# Altium PCB PCB1.PcbDoc
Units mm, origin at the board's own origin, x right, y up, seen from the top; angles counter-clockwise.
Board outline 37 x 13.8 mm, 2 copper layers (Top Layer, Bottom Layer), stack 0.98 mm thick; 3 components, 4 nets, 16 pads, 2 vias.
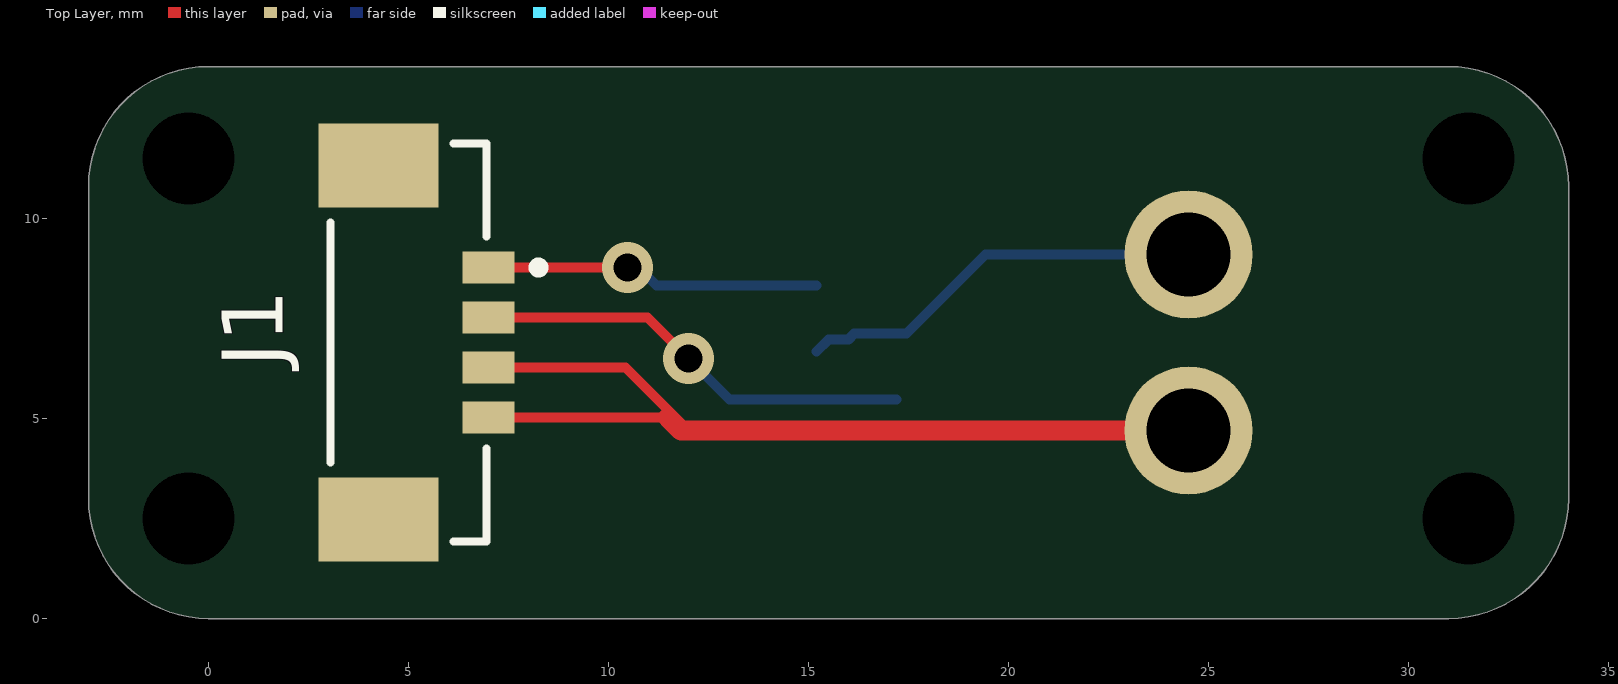
[diagram p0: Top Layer view]
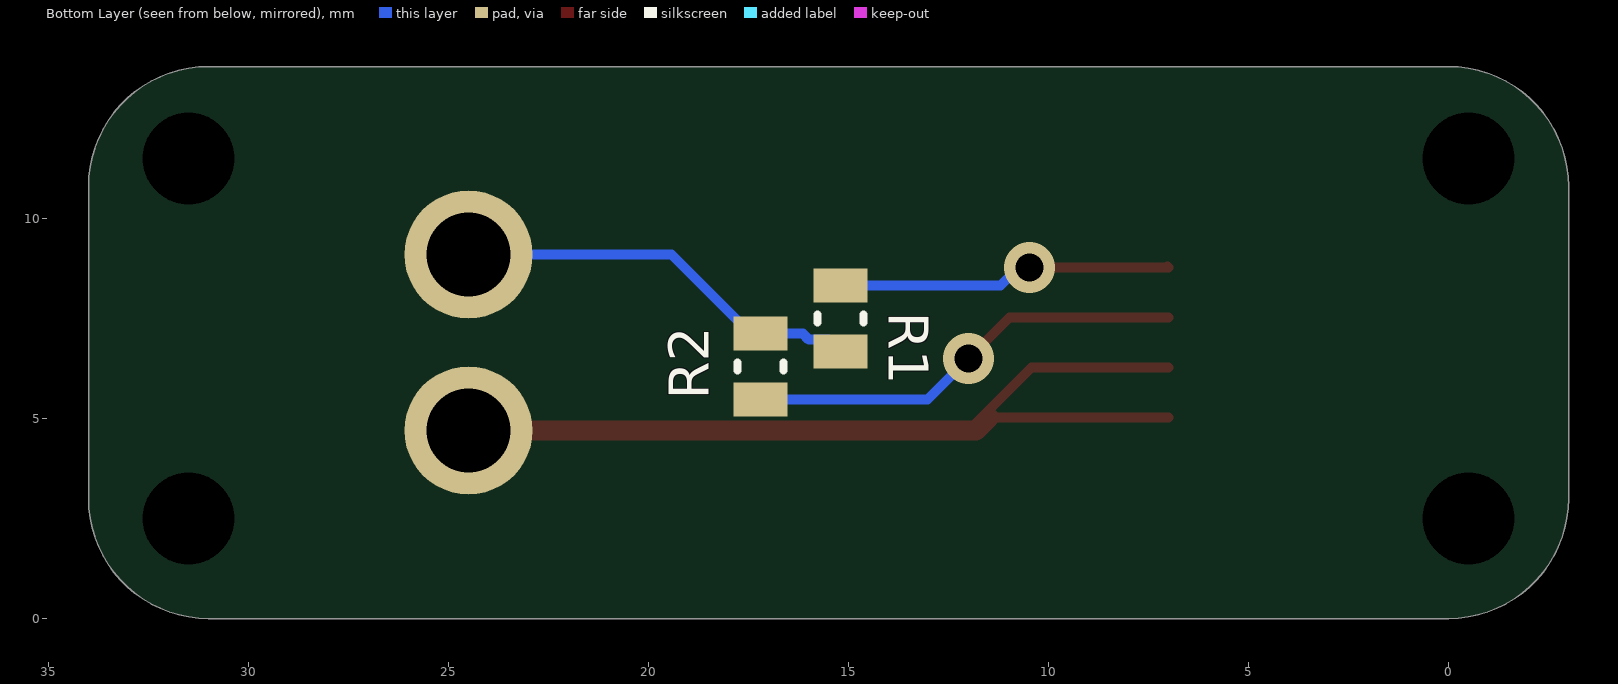
[diagram p1: Bottom Layer view, seen from below]

## Layer stack, top to bottom
Top Solder: solder mask 0.0102, Solder Resist, Dk 3.5
Top Layer: signal copper 0.0356
Dielectric 1: dielectric 0.9086, FR-4, Dk 4.8
Bottom Layer: signal copper 0.0356
Bottom Solder: solder mask 0.0102, Solder Resist, Dk 3.5

## Board outline
-3,3 ccw(c0,3) 0,0 31,0 ccw(c31,3) 34,3 34,10.8 ccw(c31,10.8) 31,13.8 0,13.8 ccw(c0,10.8) -3,10.8

## Design rules (kind name [scope] priority, off if disabled: settings)
Clearance [All] p1: gap=0.254 ignorepadtopadclearanceinfootprint=FALSE except(0: Arc-Hole Track-Hole SMDPad-Hole THPad-Hole Via-Hole Fill-Hole Poly-Hole Region-Hole Text-Hole)
PolygonConnect [All] p1: connectstyle=Relief reliefconductorwidth=0.254 reliefentries=4 polygonreliefangle="90 Angle" airgapwidth=0.254
RoutingVias [All] p1: holewidth=0.711 width=1.27 viastyle="Through Hole" minholewidth=0.711 minwidth=1.27 maxholewidth=0.711 maxwidth=1.27
SolderMaskExpansion [All] p1: expansion=0.102 istentingtop=FALSE
Width [All] p1: maxlimit=0.254 minlimit=0.254 preferedwidth=0.254
30 further rules are at their usual default settings.

## Components (designator, comment, footprint, x,y, rotation, side; value= is the part's Value field where it differs from the comment)
J1 "533980471" FP-533980471-MFG 5,6.9 r90 top
R1 "CRCW0805100RFKEA" RESC2013X50X30LL20T20 15.2,7.5 r270 bottom
R2 "CRCW0805100RFKEA" RESC2013X50X30LL20T20 17.2,6.3 r90 bottom

## Footprints (in the part's own frame and the unit in brackets; to place one, negate y for a bottom-side part, rotate by r counter-clockwise, add the part's x,y. Pads: shape width x height; smd on the part's side, far side on the other; paste and mask are expansions set on the pad)
FP-533980471-MFG [mm]
  rect 0.8x1.3 smd paste+0 mask+0: 1(1.875,-2) 2(0.625,-2) 3(-0.625,-2) 4(-1.875,-2)
  rect 2.1x3 smd paste+0 mask+0: 5(-4.425,0.75) 6(4.425,0.75)
  silkscreen extent -4.97,-3.38 4.97,1.95, body extent -5.58,-2.75 5.58,2.35, height 0.25
RESC2013X50X30LL20T20 [mm] "Chip Resistor, 2-Leads, Body 2.00x1.25mm, IPC High Density"
  rect 0.85x1.35 smd: 1(-0.825,0) 2(0.825,0)
  silkscreen extent -0.1,-0.58 0.1,0.58, body extent -1.1,-0.72 1.1,0.72, height 0.5

## Part data
J1: library part CMP-04776-000105-1, "CONN HEADER SMD 4POS 1.25MM", Ambient Temperature Range High=+105°C, Ambient Temperature Range Low=-40°C, Current Rating=1A, Manufacturer=Molex, Package=0, Temperature="-40°C to +105°C", Voltage Rating=125V, Automotive=No, Category=Conn, ComponentLink2Description=Datasheet, ComponentLink2URL=https://www.molex.com/pdm_docs/ps/PS-51021-024-001.pdf, Conn Gender=Male, Conn Orientation=Vertical, Contact Material=Tin, Device Class L1=Connectors, Device Class L2="Headers and Wire Housings", Device Class L3=unset, Digikey Description="CONN HEADER SMD 4POS 1.25MM", Footprint Url=https://www.molex.com/pdm_docs/sd/533980471_sd.pdf, Height=5.1mm, Lead Free=Yes, Manufacturer Part Number=533980471, Number Of Contacts=4, Number Of Rows=1, Octopart=https://octopart.com/53398-0471-molex-655296, Pitch=1.25mm, RoHS=TRUE, Standoff Height=0.05mm, Temperature Range High=+105°C, Temperature Range Low=-40°C
R1 R2: library part CMP-2001-04901-1, Manufacturer="Vishay Dale", Part Number=CRCW0805100RFKEA

## Free pads (board coordinates)
  round 1.524 hole 2.3 unplated: 4(-0.5,2.5) 4(-0.5,11.5) 4(31.5,2.5) 4(31.5,11.5)
  round 3.2 hole 2.1: 5(24.5,9.1) 6(24.5,4.7)

## Via types
v1: diameter 1.27, hole 0.711, Top Layer to Bottom Layer, 2 vias

## Nets (pads, with @x,y where several pads share a name; then routed paths per layer and width w, separated by ;. In a path a pad name is that pad's centre, name@x,y a point inside that pad or via, vN(x,y) a via of type N, cw(c..) or ccw(c..) an arc to the next point about the centre after c; other vN are vias at no path point)
NetJ1_1: J1.1 R1.1 | length 8.4
  Top Layer w0.254: J1.1@7.025,8.8 J1.1 v1(10.475,8.775)
  Bottom Layer w0.254: v1(10.475,8.775) 10.75,8.775 11.2,8.325 R1.1
NetJ1_2: J1.2 R2.1 | length 11
  Top Layer w0.254: J1.2 10.975,7.525 v1(12,6.5)
  Bottom Layer w0.254: v1(12,6.5) 13.025,5.475 R2.1
"Screw 1": pad.5 R1.2 R2.2 | length 10.3
  Bottom Layer w0.254: R1.2 15.498,6.973 15.992,6.973 16.144,7.125 R2.2 17.45,7.125 19.425,9.1 pad.5
"Screw 2": J1.3 J1.4 pad.6 | length 23
  Top Layer w0.254: J1.4 11.675,5.025 10.425,6.275 J1.3
  Top Layer w0.508: 11.497,5.025 11.822,4.7 pad.6
pads on no net: J1.5 J1.6

## Silkscreen, mask and mechanical layers (free items; w line width, h text height)
Mechanical 1:
  the board outline again, w0.254